# Altium PCB Button_Pad_Breakout-v05.PcbDoc
Units mil, origin at the board's own origin, x right, y up, seen from the top; angles counter-clockwise.
Board outline 3937.01 x 3937.01 mil, 2 copper layers (Top, Bottom), stack 61.811 mil thick; 30 components, 40 nets, 184 pads, 64 vias.
Unrouted connection lines stored in the file: 16.
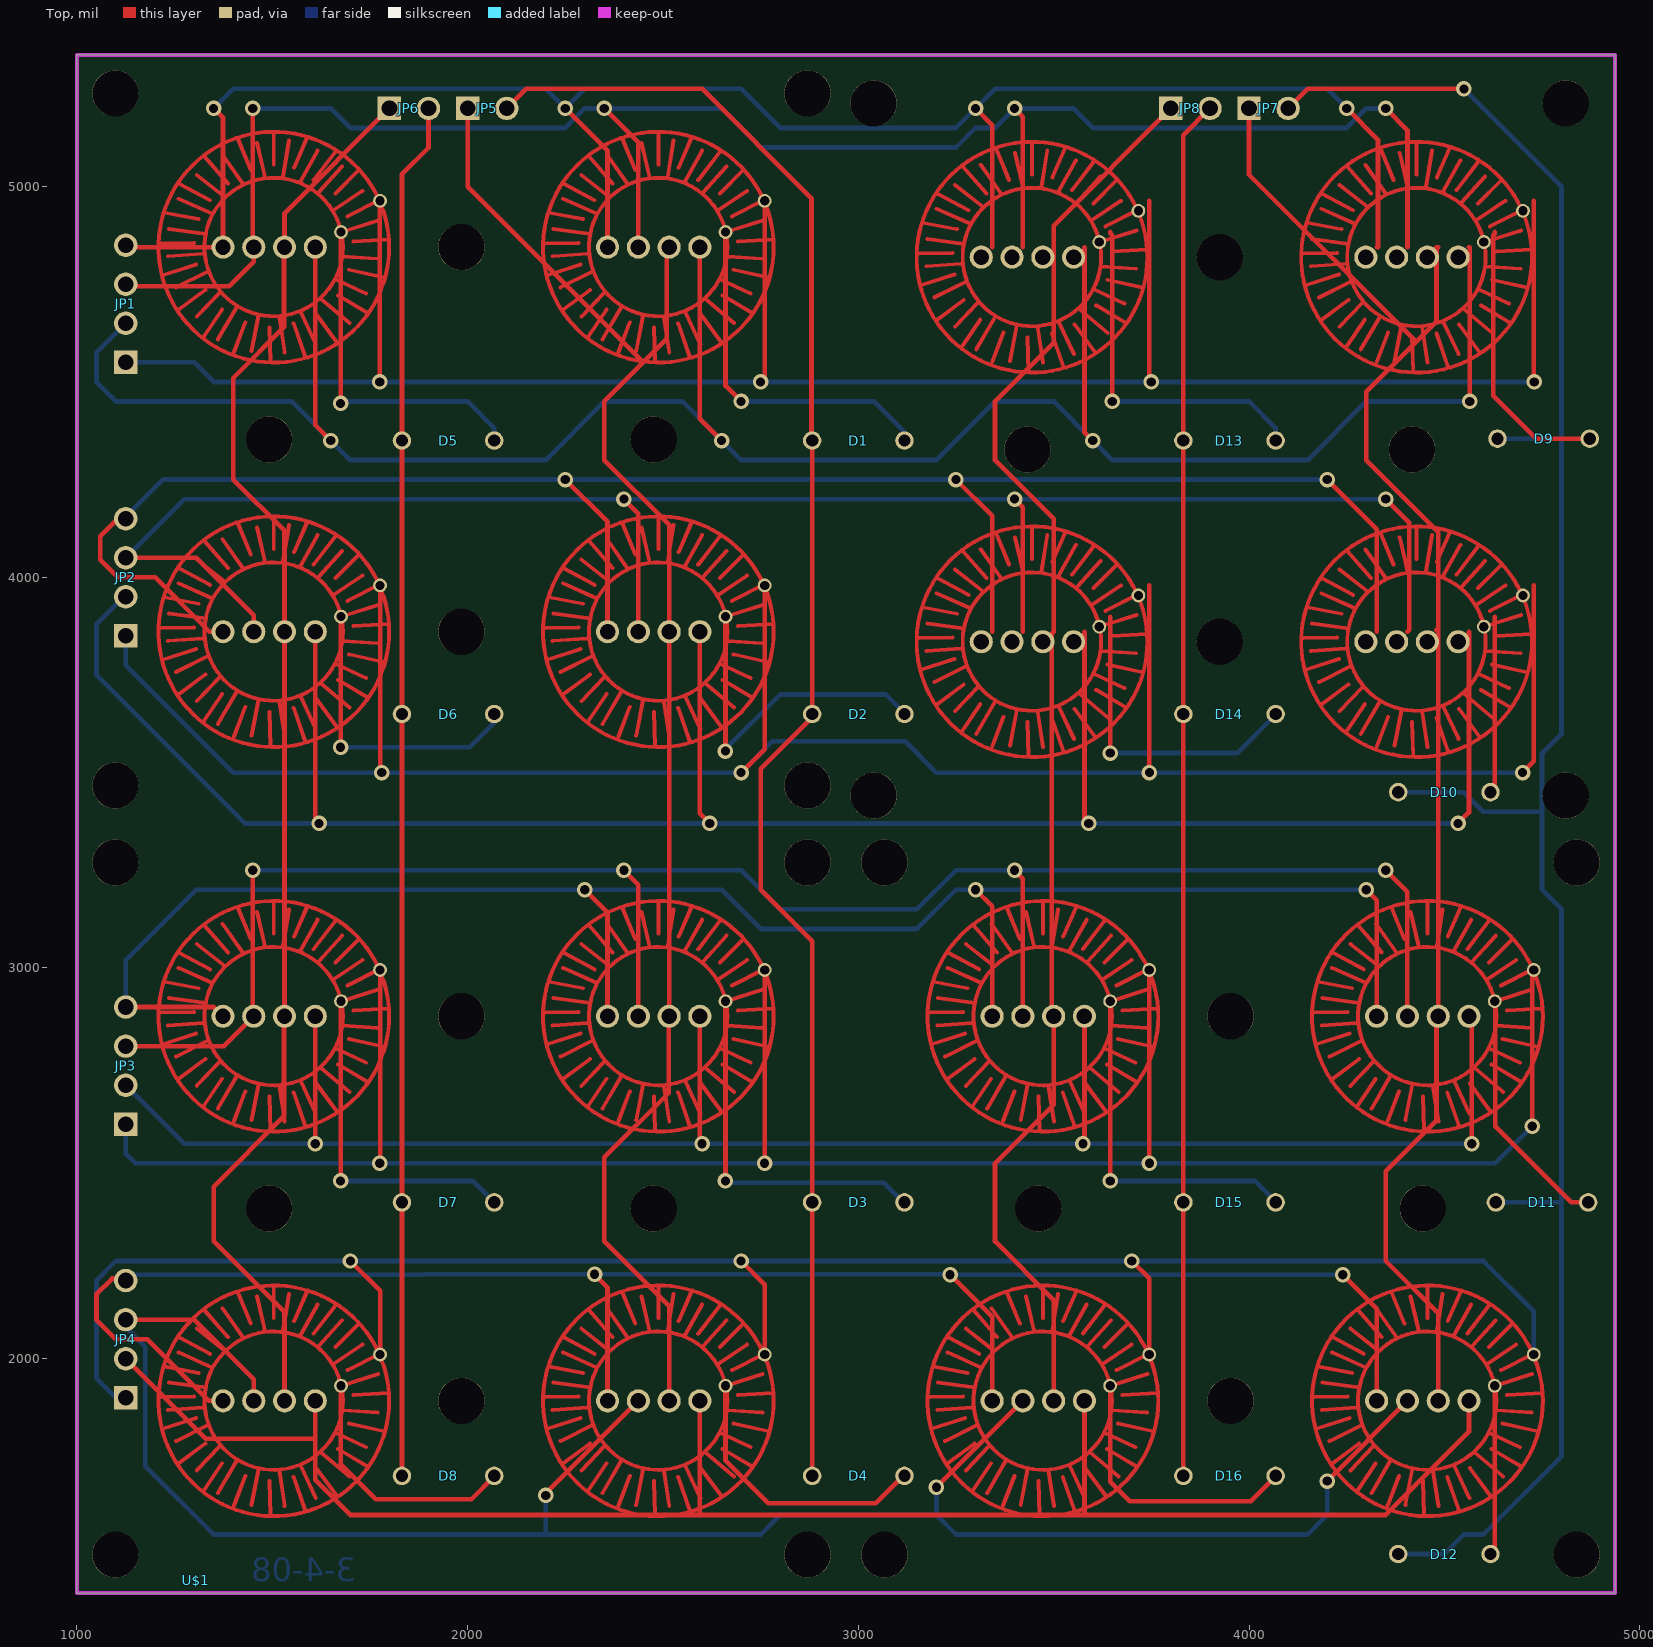
[diagram p0: Top view]
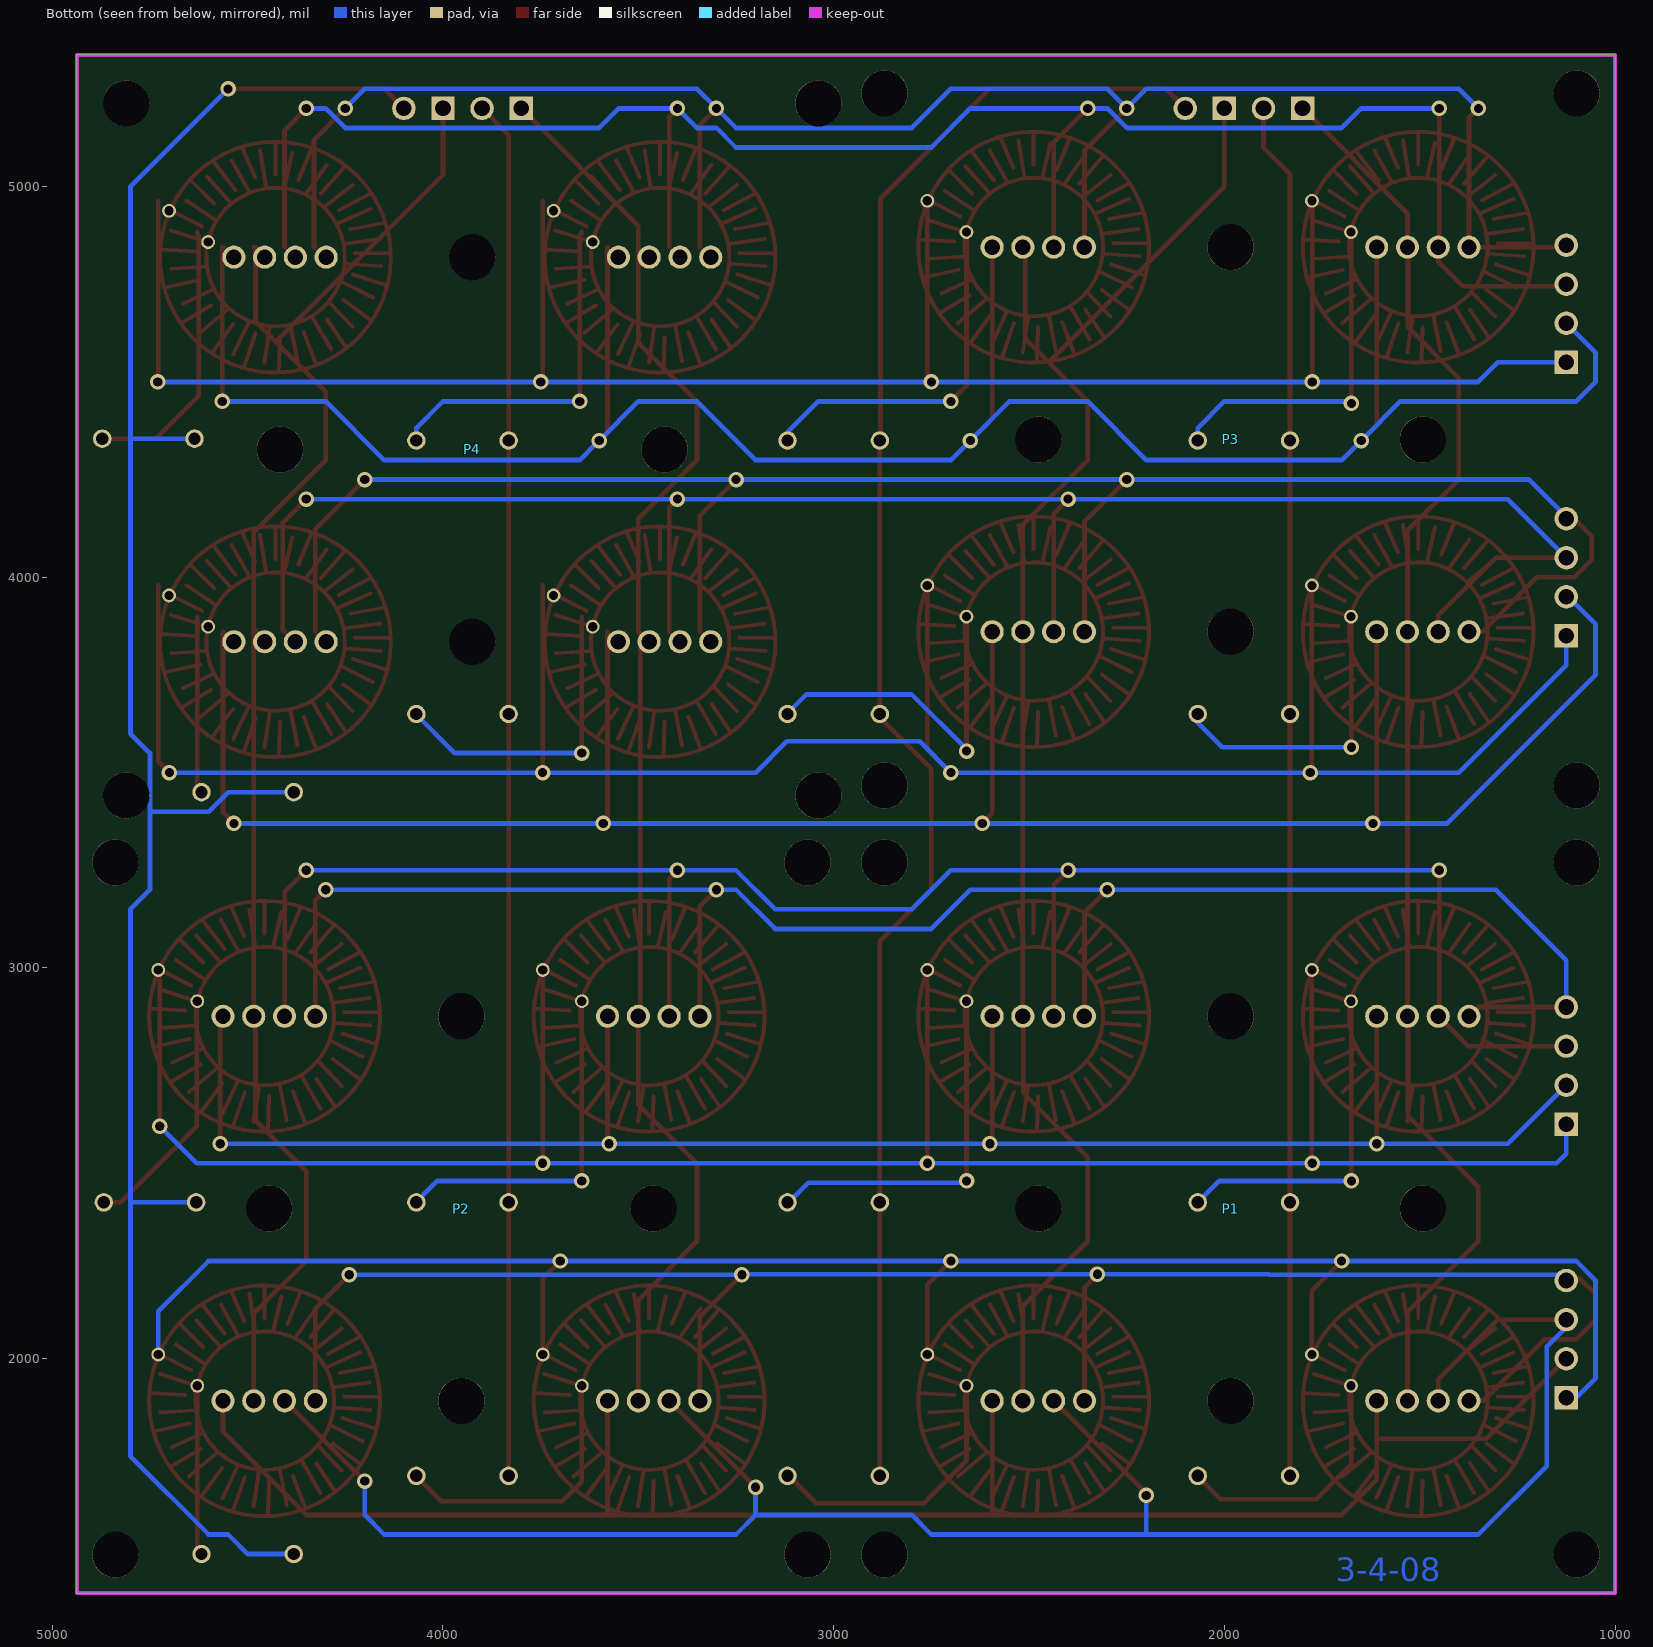
[diagram p1: Bottom view, seen from below]

## Layer stack, top to bottom
Top Solder: solder mask 0.4, Solder Resist, Dk 3.5
Top: signal copper 1.378
Dielectric 1: core 59.0551, FR-4, Dk 4.8
Bottom: signal copper 1.378
Bottom Solder: solder mask 0.4, Solder Resist, Dk 3.5

## Board outline
1000,1400 4937.01,1400 4937.01,5337.01 1000,5337.01

## Design rules (kind name [scope] priority, off if disabled: settings)
Clearance [All] p1: gap=7 ignorepadtopadclearanceinfootprint=FALSE except(0: SMDPad-SMDPad SMDPad-THPad SMDPad-Via)
Clearance "Clearance (Same Net)" [All] p2: gap=0 ignorepadtopadclearanceinfootprint=FALSE except(7: SMDPad-SMDPad SMDPad-THPad SMDPad-Via)
HoleSize HoleSize_1 [All] p1: absolutevalues=TRUE maxlimit=100000 minlimit=20 maxpercent=80.000 minpercent=20.000
HoleSize [All] p2: absolutevalues=TRUE maxlimit=100 minlimit=1 maxpercent=80.000 minpercent=20.000
HoleToHoleClearance mdViaViaSameLayer [All] p1: gap=8 allowstackedmicrovias=TRUE
HoleToHoleClearance [All] p2: gap=10 allowstackedmicrovias=TRUE
PasteMaskExpansion mlMinCreamFrame [All] p1: expansion=0
PasteMaskExpansion [All] p2: expansion=0
PolygonConnect ThermalVias [IsVia] p1: connectstyle=Direct reliefconductorwidth=10 reliefentries=4 polygonreliefangle="90 Angle" airgapwidth=10
PolygonConnect [All] p2: connectstyle=Relief reliefconductorwidth=10 reliefentries=4 polygonreliefangle="90 Angle" airgapwidth=10
RoutingVias [All] p1: holewidth=28 width=50 viastyle="Through Hole" minholewidth=28 minwidth=50 maxholewidth=28 maxwidth=50
SilkToSilkClearance [All] p1 off: silktosilkclearance=10
SilkToSolderMaskClearance [IsPad] p1 off: minsilkscreentomaskgap=10 clearancetoexposedcopper=TRUE
SolderMaskExpansion mlMinStopFrame [All] p1: expansion=4
SolderMaskExpansion [All] p2: expansion=4
Width Width_1 [All] p1: maxlimit=100000 minlimit=7 preferedwidth=10
Width [All] p2: maxlimit=10 minlimit=10 preferedwidth=10
25 further rules are at their usual default settings.

## Classes and differential pairs
component class Sheet1: P?

## Components (designator, comment, footprint, x,y, rotation, side; value= is the part's Value field where it differs from the comment)
D1 "DIODE-1N4148" DOIDE-1N4148 3000,4350 r0 top
D2 "DIODE-1N4148" DOIDE-1N4148 3000,3650 r0 top
D3 "DIODE-1N4148" DOIDE-1N4148 3000,2400 r0 top
D4 "DIODE-1N4148" DOIDE-1N4148 3000,1700 r0 top
D5 "DIODE-1N4148" DOIDE-1N4148 1950,4350 r0 top
D6 "DIODE-1N4148" DOIDE-1N4148 1950,3650 r0 top
D7 "DIODE-1N4148" DOIDE-1N4148 1950,2400 r0 top
D8 "DIODE-1N4148" DOIDE-1N4148 1950,1700 r0 top
D9 "DIODE-1N4148" DOIDE-1N4148 4753.94,4354.72 r0 top
D10 "DIODE-1N4148" DOIDE-1N4148 4500,3450 r0 top
D11 "DIODE-1N4148" DOIDE-1N4148 4750,2400 r0 top
D12 "DIODE-1N4148" DOIDE-1N4148 4500,1500 r0 top
D13 "DIODE-1N4148" DOIDE-1N4148 3950,4350 r0 top
D14 "DIODE-1N4148" DOIDE-1N4148 3950,3650 r0 top
D15 "DIODE-1N4148" DOIDE-1N4148 3950,2400 r0 top
D16 "DIODE-1N4148" DOIDE-1N4148 3950,1700 r0 top
JP1 "M04POLAR" MOLEX-1X4 1125,4550 r90 top
JP2 "M04POLAR" MOLEX-1X4 1125,3850 r90 top
JP3 "M04POLAR" MOLEX-1X4 1125,2600 r90 top
JP4 "M04POLAR" MOLEX-1X4 1125,1900 r90 top
JP5 "M02POLAR" MOLEX-1X2 2000,5200 r0 top
JP6 "M02POLAR" MOLEX-1X2 1800,5200 r0 top
JP7 "M02POLAR" MOLEX-1X2 4000,5200 r0 top
JP8 "M02POLAR" MOLEX-1X2 3800,5200 r0 top
P1 "BUTTONPAD-4x4" BUTTONPAD-2X2 2968.5,1400 r180 bottom
P2 "BUTTONPAD-4x4" BUTTONPAD-2X2 4937.01,1400 r180 bottom
P3 "BUTTONPAD-4x4" BUTTONPAD-2X2 2968.5,3368.5 r180 bottom
P4 "BUTTONPAD-4x4" BUTTONPAD-2X2 4909.25,3342.87 r180 bottom
U$1 "LOGO-SFE" SFE-NEW-WEBLOGO 1304.33,1433.07 r0 top
U$2 "CREATIVE_COMMONS" CREATIVE_COMMONS 1700,1000 r0 top

## Footprints (in the part's own frame and the unit in brackets; to place one, negate y for a bottom-side part, rotate by r counter-clockwise, add the part's x,y. Pads: shape width x height; smd on the part's side, far side on the other; paste and mask are expansions set on the pad)
BUTTONPAD-2X2 [mm] "BUTTONPAD-2X2"
  round 3 hole 3: 1(2.5,2.5) 1(2.5,47.5) 1(12.5,25) 1(25,12.5) 1(25,37.5) 1(37.5,25) 1(47.5,2.5) 1(47.5,47.5)
  round 1.5 hole 1: BLU1(13.5,12.5) BLU2(38.5,12.5) BLU3(13.5,37.5) BLU4(38.5,37.5) GND1(11.5,12.5) GND2(36.5,12.5) GND3(11.5,37.5) GND4(36.5,37.5) GRN1(15.5,12.5) GRN2(40.5,12.5) GRN3(15.5,37.5) GRN4(40.5,37.5) RED1(9.5,12.5) RED2(34.5,12.5) RED3(9.5,37.5) RED4(34.5,37.5)
  round 0.9 hole 0.6: SIG1(5.288,15.513) SIG2(7.828,13.481) SIG3(30.288,15.513) SIG4(32.828,13.481) SIG5(5.288,40.513) SIG6(7.828,38.481) SIG7(30.288,40.513) SIG8(32.828,38.481)
  Bottom circle w0.254: c12.2,37.5 r7.5
  Bottom circle w0.254: c12.21,37.51 r4.5
  Bottom circle w0.254: c37.2,37.5 r7.5
  Bottom circle w0.254: c37.21,37.51 r4.5
  Bottom circle w0.254: c12.2,12.5 r7.5
  Bottom circle w0.254: c12.21,12.51 r4.5
  Bottom circle w0.254: c37.2,12.5 r7.5
  Bottom circle w0.254: c37.21,12.51 r4.5
  Bottom lines w0.254: 44.58,12.74 42.38,12.77 ; 44.58,37.74 42.38,37.77 ; 44.42,10.68 42.25,11.38 ; 44.42,35.68 42.25,36.38 ; 44.31,14.74 42.09,14.32 ; 44.31,39.74 42.09,39.32 ; 44.07,11.91 41.8,12.07 ; 44.07,36.91 41.8,37.07 ; 44.01,13.68 41.61,13.36 ; 44.01,38.68 41.61,38.36 ; 43.56,9.88 41.5,10.9 ; 43.56,34.88 41.5,35.9 ; 43.4,15.65 41.18,14.66 ; 43.4,40.65 41.18,39.66 ; 43.37,8.44 41.64,9.72 ; 43.37,33.44 41.64,34.72 ; 43.35,16.62 41.34,15.55 ; 43.35,41.62 41.34,40.55 ; 42.21,7.98 40.7,9.56 ; 42.21,17.2 40.38,15.76 ; 42.21,32.98 40.7,34.56 ; 42.21,42.2 40.38,40.76 ; 41.74,6.7 40.57,8.44 ; 41.74,31.7 40.57,33.44 ; 41.72,18.41 40.17,16.64 ; 41.72,43.41 40.17,41.64 ; 40.83,6.51 39.61,8.6 ; 40.83,31.51 39.61,33.6 ; 40.54,18.51 39.18,16.59 ; 40.54,43.51 39.18,41.59 ; 39.79,5.69 39.05,7.62 ; 39.79,30.69 39.05,32.62 ; 39.53,19.53 38.7,17.52 ; 39.53,44.53 38.7,42.52 ; 38.64,5.74 38.19,8.04 ; 38.64,30.74 38.19,33.04 ; 38.3,19.29 37.79,17.12 ; 38.3,44.29 37.79,42.12 ; 37.49,7.29 37.42,5.06 ; 37.49,32.29 37.42,30.06 ; 37.2,17.87 37.2,19.96 ; 37.2,42.87 37.2,44.96 ; 36.83,7.93 36.49,5.66 ; 36.83,32.93 36.49,30.66 ; 36.59,17.07 36.21,19.45 ; 36.59,42.07 36.21,44.45 ; 35.91,7.55 35.17,5.42 ; 35.91,32.55 35.17,30.42 ; 35.88,17.68 35.04,19.61 ; 35.88,42.68 35.04,44.61 ; 35.46,8.28 34.47,6.19 ; 35.46,16.8 34.35,18.78 ; 35.46,33.28 34.47,31.19 ; 35.46,41.8 34.35,43.78 ; 34.61,16.86 33.19,18.7 ; 34.61,41.86 33.19,43.7 ; 34.44,8.13 33.11,6.33 ; 34.44,33.13 33.11,31.33 ; 34.29,16.05 32.76,17.74 ; 34.29,41.05 32.76,42.74 ; 34.13,9.13 32.28,7.58 ; 34.13,34.13 32.28,32.58 ; 33.35,14.88 31.43,16.16 ; 33.35,39.88 31.43,41.16 ; 33.2,16 31.7,17.5 ; 33.2,41 31.7,42.5 ; 33.19,10.42 31.19,9.48 ; 33.19,35.42 31.19,34.48 ; 33.03,9.37 31.13,8.25 ; 33.03,34.37 31.13,33.25 ; 32.74,11.89 30.44,11.75 ; 32.74,13.5 30.41,14.24 ; 32.74,36.89 30.44,36.75 ; 32.74,38.5 30.41,39.24 ; 32.42,14.5 30.36,15.54 ; 32.42,39.5 30.36,40.54 ; 32.31,11.03 30.04,10.52 ; 32.31,36.03 30.04,35.52 ; 32.02,12.87 29.72,13.01 ; 32.02,37.87 29.72,38.01 ; 19.58,12.74 17.38,12.77 ; 19.58,37.74 17.38,37.77 ; 19.42,10.68 17.25,11.38 ; 19.42,35.68 17.25,36.38 ; 19.31,14.74 17.09,14.32 ; 19.31,39.74 17.09,39.32 ; 19.07,11.91 16.8,12.07 ; 19.07,36.91 16.8,37.07 ; 19.01,13.68 16.61,13.36 ; 19.01,38.68 16.61,38.36 ; 18.56,9.88 16.5,10.9 ; 18.56,34.88 16.5,35.9 ; 18.4,15.65 16.18,14.66 ; 18.4,40.65 16.18,39.66 ; 18.37,8.44 16.64,9.72 ; 18.37,33.44 16.64,34.72 ; 18.35,16.62 16.34,15.55 ; 18.35,41.62 16.34,40.55 ; 17.21,7.98 15.7,9.56 ; 17.21,17.2 15.38,15.76 ; 17.21,32.98 15.7,34.56 ; 17.21,42.2 15.38,40.76 ; 16.74,6.7 15.57,8.44 ; 16.74,31.7 15.57,33.44 ; 16.72,18.41 15.17,16.64 ; 16.72,43.41 15.17,41.64 ; 15.83,6.51 14.61,8.6 ; 15.83,31.51 14.61,33.6 ; 15.54,18.51 14.18,16.59 ; 15.54,43.51 14.18,41.59 ; 14.79,5.69 14.05,7.62 ; 14.79,30.69 14.05,32.62 ; 14.53,19.53 13.7,17.52 ; 14.53,44.53 13.7,42.52 ; 13.64,5.74 13.19,8.04 ; 13.64,30.74 13.19,33.04 ; 13.3,19.29 12.79,17.12 ; 13.3,44.29 12.79,42.12 ; 12.49,7.29 12.42,5.06 ; 12.49,32.29 12.42,30.06 ; 12.2,17.87 12.2,19.96 ; 12.2,42.87 12.2,44.96 ; 11.83,7.93 11.49,5.66 ; 11.83,32.93 11.49,30.66 ; 11.59,17.07 11.21,19.45 ; 11.59,42.07 11.21,44.45 ; 10.91,7.55 10.17,5.42 ; 10.91,32.55 10.17,30.42 ; 10.88,17.68 10.04,19.61 ; 10.88,42.68 10.04,44.61 ; 10.46,8.28 9.47,6.19 ; 10.46,16.8 9.35,18.78 ; 10.46,33.28 9.47,31.19 ; 10.46,41.8 9.35,43.78 ; 9.61,16.86 8.19,18.7 ; 9.61,41.86 8.19,43.7 ; 9.44,8.13 8.11,6.33 ; 9.44,33.13 8.11,31.33 ; 9.29,16.05 7.76,17.74 ; 9.29,41.05 7.76,42.74 ; 9.13,9.13 7.28,7.58 ; 9.13,34.13 7.28,32.58 ; 8.35,14.88 6.43,16.16 ; 8.35,39.88 6.43,41.16 ; 8.2,16 6.7,17.5 ; 8.2,41 6.7,42.5 ; 8.19,10.42 6.19,9.48 ; 8.19,35.42 6.19,34.48 ; 8.03,9.37 6.13,8.25 ; 8.03,34.37 6.13,33.25 ; 7.74,11.89 5.44,11.75 ; 7.74,13.5 5.41,14.24 ; 7.74,36.89 5.44,36.75 ; 7.74,38.5 5.41,39.24 ; 7.42,14.5 5.36,15.54 ; 7.42,39.5 5.36,40.54 ; 7.31,11.03 5.04,10.52 ; 7.31,36.03 5.04,35.52 ; 7.02,12.87 4.72,13.01 ; 7.02,37.87 4.72,38.01
CREATIVE_COMMONS [mil] "CREATIVE_COMMONS"
DOIDE-1N4148 [mil] "DOIDE-1N4148"
  round 47.25 hole 31.5: P$1(118.11,0) P$2(-118.11,0)
MOLEX-1X2 [mil] "MOLEX-1X2"
  rect 60x60 hole 40: 1(0,0)
  round 60 hole 40: 2(100,0)
MOLEX-1X4 [mil] "MOLEX-1X4"
  rect 60x60 hole 40: 1(0,0)
  round 60 hole 40: 2(100,0) 3(200,0) 4(300,0)
SFE-NEW-WEBLOGO [mil] "SFE-NEW-WEBLOGO"

## Part data
JP1 JP2 JP3 JP4: "Header 4Standard 4-pin 0.1\" header. Use with straight break away headers (SKU : PRT-00116), right angle break away headers (PRT-00553), swiss pins (PRT-00743), machine pins (PRT-00117), and female headers (PRT-00115). Molex polarized connector foot print use with SKU : PRT-08231 with associated crimp pins and housings."
JP5 JP6 JP7 JP8: "Header 2Standard 2-pin 0.1\" header. Use with straight break away headers (SKU : PRT-00116), right angle break away headers (PRT-00553), swiss pins (PRT-00743), machine pins (PRT-00117), and female headers (PRT-00115). Molex polarized connector foot print use with SKU : PRT-08233 with associated crimp pins and housings."
P1 P2 P3 P4: library part BUTTONPAD-2X2, "5mm Button PadProven layout and schematic for 2x2 button pad. Panelize this device/fp to a 4x4 pad if needed. Spark Fun Electronics SKU : COM-07835. Compatible common cathode tri-color LED SKU : COM-00105"
U$1: "Spark Fun Electronics PCB LogoThis is the standard Spark Fun Electronics PCB logo.", SFE=SFE
U$2: Designby="Design by:", http://creativecommons.org/licenses/by-sa/3.0=http://creativecommons.org/licenses/by-sa/3.0, ReleasedundertheCreativeCommonsAttributionShare-Alike3.0License="Released under the Creative Commons Attribution Share-Alike 3.0 License"

## Via types
v1: diameter 39.62/39.62 (per signal layer), hole 23.62, Top to Bottom, 64 vias

## Nets (pads, with @x,y where several pads share a name; then routed paths per layer and width w, separated by ;. In a path a pad name is that pad's centre, name@x,y a point inside that pad or via, vN(x,y) a via of type N, cw(c..) or ccw(c..) an arc to the next point about the centre after c; other vN are vias at no path point)
BLUE1: JP1.3 P3.BLU3 P3.BLU4 P4.BLU3 P4.BLU4 | length 4948.1
  Top w12: JP1.3 1130,4745 1390,4745 1452.76,4807.76 1452.76,4847.24 1450,4850 v1(1450,5200) ; v1(2350,5200) 2437.01,5112.99 P3.BLU3 ; v1(3400,5200) 3421.26,5178.74 3421.26,4844.88 ; v1(4350,5200) 4405.51,5144.49 4405.51,4844.88
  Bottom w12: v1(1450,5200) 1650,5200 1700,5150 2250,5150 2300,5200 v1(2350,5200) 2650,5200 2750,5100 3250,5100 3300,5150 3350,5150 v1(3400,5200) 3550,5200 3600,5150 4250,5150 4300,5200 v1(4350,5200)
BLUE2: JP2.3 P3.BLU1 P3.BLU2 P4.BLU1 P4.BLU2 | length 4786.7
  Top w12: JP2.3 1305,4050 1452.76,3902.24 P3.BLU2 ; v1(2400,4200) 2437.01,4162.99 P3.BLU1 ; v1(3400,4200) 3421.26,4178.74 3421.26,3860.63 ; v1(4350,4200) 4410,4140 4410,3865 4409.88,3865 4405.51,3860.63
  Bottom w12: JP2.3 1275,4200 v1(2400,4200) v1(3400,4200) v1(4350,4200)
BLUE3: JP3.3 P1.BLU3 P1.BLU4 P2.BLU3 P2.BLU4 | length 4886.9
  Top w12: JP3.3 1376.38,2800 P1.BLU4 1450,2879.13 v1(1450,3250) ; v1(2400,3250) 2437.01,3212.99 P1.BLU3 ; v1(3400,3250) 3421.26,3228.74 P2.BLU4 ; v1(4350,3250) 4405,3195 P2.BLU3@4405,2875.87 ; P2.BLU3@4405,2875 P2.BLU3@4405,2875.87 ; P2.BLU3 P2.BLU3@4405,2875.87
  Bottom w12: v1(1450,3250) v1(2400,3250) 2700,3250 2800,3150 3150,3150 3250,3250 v1(3400,3250) v1(4350,3250)
BLUE4: JP4.3 P1.BLU1 P1.BLU2 P2.BLU1 P2.BLU2 | length 5202.8
  Top w12: JP4.3 1300,2100 1452.76,1947.24 P1.BLU2 ; v1(2200,1650) 2200,1655.12 P1.BLU1 ; v1(3200,1670.87) P2.BLU2 ; v1(4200,1686.61) P2.BLU1
  Bottom w12: JP4.3 1125,2080 1175,2030 1175,1725 1350,1550 2200,1550 ; v1(2200,1650) 2200,1550 ; v1(3200,1670.87) 3200,1600 ; v1(4200,1686.61) 4200,1600 4150,1550 3250,1550 3200,1600 ; 2200,1550 2750,1550 2800,1600 3200,1600
GREEN1: JP1.4 P3.GRN3 P3.GRN4 P4.GRN3 P4.GRN4 | length 4846
  Top w12: JP1.4 1130.12,4844.88 P3.GRN4 1374.02,5175.98 v1(1350,5200) ; v1(2250,5200) 2358.27,5091.73 P3.GRN3 ; v1(3300,5200) 3342.52,5157.48 3342.52,4844.88 ; v1(4250,5200) 4330,5120 4330,4845 4326.89,4845 4326.77,4844.88
  Bottom w12: v1(1350,5200) 1400,5250 2200,5250 v1(2250,5200) 2300,5250 2700,5250 2800,5150 3250,5150 v1(3300,5200) 3350,5250 4200,5250 v1(4250,5200)
GREEN2: JP2.4 P3.GRN1 P3.GRN2 P4.GRN1 P4.GRN2 | length 4961.3
  Top w12: JP2.4 1115,4150 1110,4155 1060,4105 1060,4045 1105,4000 1200,4000 1339.37,3860.63 P3.GRN2 ; v1(2250,4250) 2358.27,4141.73 P3.GRN1 ; v1(3250,4250) 3342.52,4157.48 3342.52,3860.63 ; v1(4200,4250) 4326.77,4123.23 4326.77,3860.63
  Bottom w12: JP2.4 1125,4155 1220,4250 v1(2250,4250) v1(3250,4250) v1(4200,4250)
GREEN3: JP3.4 P1.GRN3 P1.GRN4 P2.GRN3 P2.GRN4 | length 4739.9
  Top w12: JP3.4 1350.39,2900 P1.GRN4 ; v1(2300,3200) 2358.27,3141.73 P1.GRN3 ; v1(3300,3200) 3342.52,3157.48 P2.GRN4 ; v1(4300,3200) 4326.77,3173.23 P2.GRN3
  Bottom w12: JP3.4@1130,2900 JP3.4 1125,3020 1305,3200 v1(2300,3200) 2650,3200 2750,3100 3150,3100 3250,3200 v1(3300,3200) v1(4300,3200)
GREEN4: JP4.4 P1.GRN1 P1.GRN2 P2.GRN1 P2.GRN2 | length 4760.9
  Top w12: JP4.4 1120,2205 1090,2205 1050,2165 1050,2100 1100,2050 1180,2050 1337.87,1892.13 P1.GRN2 ; v1(2325,2216) 2325,2215 2358.27,2181.73 P1.GRN1 ; v1(3235,2215) 3342.52,2107.48 P2.GRN2 ; v1(4240,2215) 4326.77,2128.23 P2.GRN1
  Bottom w12: JP4.4 1140,2215 1885,2215 1886,2216 v1(2325,2216) 3231,2216 3235,2220 v1(3235,2215) v1(4240,2215)
LED-GND1: JP5.1 P1.GND1 P1.GND3 P3.GND1 P3.GND3 | length 4064.8
  Top w12: JP5.1 2000,5000 2450,4550 ; P3.GND1@2515,3865 P3.GND1@2515.75,3864.25 ; P1.GND1@2515.75,1892.13 2515.75,2134.25 2350,2300 2350,2515 2515,2680 2515,2875 2515.75,2875.75 2515.75,3860.63 P3.GND1@2515.75,3864.25 ; P3.GND3@2515.75,4844.88 2515.75,4840.75 2510,4835 2510,4610 2450,4550 ; 2450,4550 2350,4450 2350,4300 2515.75,4134.25 P3.GND1@2515.75,3864.25
LED-GND2: JP6.1 P1.GND2 P1.GND4 P3.GND2 P3.GND4 | length 3689.4
  Top w12: P1.GND2 1531.5,2118.5 1350,2300 1350,2440 1530,2620 1530,2875 1531.38,2876.38 P1.GND4 1531.5,3858.5 1530,3860 1530.63,3860.63 P3.GND2 1531.5,4118.5 1400,4250 1400,4510 1530,4640 1530,4830 1540,4840 1535.12,4844.88 P3.GND4 1531.5,4931.5 JP6.1
LED-GND3: JP7.1 P2.GND1 P2.GND3 P4.GND1 P4.GND3 | length 4001.5
  Top w12: JP7.1 4000,5030 4427.5,4602.5 ; 4480,3865 4484.25,3860.75 ; P2.GND1 4484.25,2115.75 4350,2250 4350,2480 4480,2610 4480,2875 4481.38,2876.38 P2.GND3 4484.25,3860.63 4484.25,3860.75 ; 4484.25,4844.88 4480.12,4844.88 4480,4845 4480,4655 4427.5,4602.5 ; 4427.5,4602.5 4300,4475 4300,4300 4484.25,4115.75 4484.25,3860.75
LED-GND4: JP8.1 P2.GND2 P2.GND4 P4.GND2 P4.GND4 | length 3686.2
  Top w12: P2.GND2 3500,2150 3350,2300 3350,2500 3500,2650 3500,2875 P2.GND4@3498.62,2876.38 ; P2.GND4 P2.GND4@3498.62,2876.38 ; JP8.1 3500,4900 3500,4600 3350,4450 3350,4300 3500,4150 3500,3860 3495,3855 3495,2880 P2.GND4@3498.62,2876.38
NetD1_P$1: D1.P$1 P3.SIG6 | length 921.6
  Top w12: P3.SIG6 2660.31,4489.69 v1(2700,4450)
  Bottom w12: v1(2700,4450) 3040,4450 3116.14,4373.86 D1.P$1
NetD2_P$1: D2.P$1 P3.SIG2 | length 891.5
  Top w12: v1(2660,3555) 2660,3900 2660.31,3899.69 P3.SIG2
  Bottom w12: v1(2660,3555) 2660,3560 2800,3700 3070,3700 3120,3650 D2.P$1
NetD3_P$1: D3.P$1 P1.SIG6 | length 941
  Top w12: v1(2660,2455) 2660,2910 2660.31,2910.31 P1.SIG6
  Bottom w12: v1(2660,2455) 2665,2450 3065,2450 3115,2400 D3.P$1
NetD4_P$1: D4.P$1 P1.SIG2 | length 723.5
  Top w12: P1.SIG2 2660,1930.43 2660,1740 2770,1630 3045,1630 3115,1700 D4.P$1
NetD5_P$1: D5.P$1 P3.SIG8 | length 898.4
  Top w12: v1(1675,4445) 1675,4880 1676.06,4881.06 P3.SIG8
  Bottom w12: v1(1675,4445) 1680,4440 1690,4450 2000,4450 2068.11,4381.89 D5.P$1
NetD6_P$1: D6.P$1 P3.SIG4 | length 777.5
  Top w12: v1(1675,3565) 1675,3900 1675.75,3899.25 P3.SIG4
  Bottom w12: v1(1675,3565) 2005,3565 2068.11,3628.11 D6.P$1
NetD7_P$1: D7.P$1 P1.SIG8 | length 877
  Top w12: v1(1675,2455) 1675,2915 P1.SIG8
  Bottom w12: v1(1675,2455) 2013.11,2455 D7.P$1
NetD8_P$1: D8.P$1 P1.SIG4 | length 660.2
  Top w12: P1.SIG4 1675,1929.69 1675,1730 1765,1640 2010,1640 2070,1700 D8.P$1
NetD9_P$1: D9.P$1 P4.SIG6 | length 712.8
  Top w12: 4628.82,4883.5 4628.82,4878.82 4625,4875 4625,4465 4735.28,4354.72 D9.P$1
NetD10_P$1: D10.P$1 P4.SIG2 | length 458.1
  Top w12: D10.P$1 4615,3450 4628.82,3463.82 4628.82,3899.25
NetD11_P$1: D11.P$1 P2.SIG6 | length 639.4
  Top w12: P2.SIG6 4628.82,2911.18 4630,2910 4630,2595 4825,2400 D11.P$1
NetD12_P$1: D12.P$1 P2.SIG2 | length 445.2
  Top w12: D12.P$1 4618.11,1496.89 4620,1495 4628.82,1503.82 P2.SIG2
NetD13_P$1: D13.P$1 P4.SIG8 | length 918.1
  Top w12: 3644.57,4883.5 3644.57,4880.43 3650,4875 v1(3650,4450)
  Bottom w12: v1(3650,4450) 3655,4455 3660,4450 4000,4450 4068.11,4381.89 D13.P$1
NetD14_P$1: D14.P$1 P4.SIG4 | length 817.7
  Top w12: 3644.57,3899.25 3644.57,3550.43 v1(3645,3550)
  Bottom w12: v1(3645,3550) 3970,3550 4070,3650 D14.P$1
NetD15_P$1: D15.P$1 P2.SIG8 | length 916.3
  Top w12: P2.SIG8 3640,2915 3645,2910 v1(3645,2455)
  Bottom w12: v1(3645,2455) 4015,2455 4070,2400 D15.P$1
NetD16_P$1: D16.P$1 P2.SIG4 | length 720.5
  Top w12: P2.SIG4 3644.57,1930.43 3645,1930 3645,1685 3695,1635 4005,1635 4070,1700 D16.P$1
RED1: JP1.2 P3.RED3 P3.RED4 P4.RED3 P4.RED4 | length 6029.5
  Top w12: P3.RED4 1610.24,4389.76 v1(1650,4350) ; P3.RED3 2594.49,4405.51 v1(2650,4350) ; 3578.74,4844.88 3578.74,4371.26 v1(3600,4350) ; 4562.99,4844.88 4563.11,4845 4565,4845 v1(4565,4450)
  Bottom w12: JP1.2 1050,4575 1050,4500 1100,4450 1550,4450 v1(1650,4350) 1700,4300 2200,4300 2350,4450 2550,4450 v1(2650,4350) 2700,4300 3200,4300 3350,4450 3500,4450 v1(3600,4350) ; v1(4565,4450) 4300,4450 4150,4300 3650,4300 v1@3605,4345 ; v1(3600,4350) v1@3605,4345 ; v1(3600,4350) 3600,4345 v1@3605,4345
RED2: JP2.2 P3.RED1 P3.RED2 P4.RED1 P4.RED2 | length 5869.8
  Top w12: P3.RED2 1610.24,3384.76 1620,3375 v1(1620,3370) ; P3.RED1 2594.49,3395.51 v1(2620,3370) ; 3578.74,3860.63 3578.74,3381.26 v1(3590,3370) ; v1(4535,3370) 4562.99,3397.99 4562.99,3860.63
  Bottom w12: JP2.2 1120,3950 1050,3880 1050,3750 1430,3370 v1(1620,3370) v1(2620,3370) v1(3590,3370) v1(4535,3370)
RED3: JP3.2 P1.RED3 P1.RED4 P2.RED3 P2.RED4 | length 4819.9
  Top w12: v1(1610,2550) 1610.24,2550.24 P1.RED4 ; P1.RED3 2594.49,2560.51 2600,2555 v1(2600,2550) ; v1(3575,2550) 3575,2555 3578.74,2558.74 P2.RED4 ; P2.RED3 4563.62,2876.38 4570,2870 v1(4570,2550)
  Bottom w12: JP3.2 1275,2550 v1(1610,2550) v1(2600,2550) v1(3575,2550) v1(4570,2550)
RED4: JP4.2 P1.RED1 P1.RED2 P2.RED1 P2.RED2 | length 4514.8
  Top w12: JP4.2 1330,1795 1610.24,1795 ; P1.RED2 1610.24,1795 ; P1.RED1 2594.49,1605.51 2595,1605 2595,1600 ; P2.RED2 3578.74,1606.26 3580,1605 3580,1600 ; P2.RED1 4562.99,1812.99 4350,1600 3580,1600 ; 1610.24,1795 1610.24,1689.76 1700,1600 2595,1600 ; 2595,1600 3580,1600
SWITCH1: JP1.1 P3.SIG5 P3.SIG7 P4.SIG5 P4.SIG7 | length 5487.2
  Top w12: v1(1775,4500) 1775,4960 1776.06,4961.06 P3.SIG7 ; v1(2750,4500) 2760.32,4510.32 P3.SIG5 ; 3744.57,4963.5 3744.57,4505.43 v1(3750,4500) ; 4728.82,4963.5 4728.82,4501.18 v1(4730,4500)
  Bottom w12: JP1.1 1300,4550 1350,4500 v1(1775,4500) v1(2750,4500) v1(3750,4500) v1(4730,4500)
SWITCH2: JP2.1 P3.SIG1 P3.SIG3 P4.SIG1 P4.SIG3 | length 5784.4
  Top w12: P3.SIG3 1776.06,3523.94 v1(1780,3500) ; v1(2700,3500) 2760.32,3560.32 P3.SIG1 ; 3744.57,3979.25 3744.57,3555.43 v1(3745,3500) ; v1(4700,3500) 4728.82,3528.82 4728.82,3979.25
  Bottom w12: JP2.1 1125,3775 1400,3500 v1(1780,3500) v1(2700,3500) 2780,3580 3120,3580 3200,3500 v1(3745,3500) v1(4700,3500)
SWITCH3: JP3.1 P1.SIG5 P1.SIG7 P2.SIG5 P2.SIG7 | length 5612
  Top w12: v1(1775,2500) 1776.06,2501.06 P1.SIG7 ; v1(2760,2500) 2760.32,2500.31 P1.SIG5 ; P2.SIG7 3744.57,2505.43 3745,2505 v1(3745,2500) ; v1(4725,2595) 4725,2990 4728.82,2993.82 P2.SIG5
  Bottom w12: JP3.1 1125,2525 1150,2500 v1(1775,2500) v1(2760,2500) v1(3745,2500) 4630,2500 v1(4725,2595)
SWITCH4: JP4.1 P1.SIG1 P1.SIG3 P2.SIG1 P2.SIG3 | length 5001.7
  Top w12: v1(1700,2250) 1776.06,2173.94 P1.SIG3 ; v1(2700,2250) 2760.32,2189.69 P1.SIG1 ; v1(3700,2250) 3744.57,2205.43 P2.SIG3
  Bottom w12: JP4.1 1100,1900 1050,1950 1050,2200 1100,2250 v1(1700,2250) v1(2700,2250) v1(3700,2250) 4600,2250 4728.82,2121.18 P2.SIG1
SWT-GND1: D1.P$2 D2.P$2 D3.P$2 D4.P$2 JP5.2 | length 4301.3
  Top w12: JP5.2 2150,5250 2600,5250 2880,4970 D1.P$2@2880,4350 ; D4.P$2 2881.89,2398.11 2880,2400 D3.P$2 2881.89,3068.11 2750,3200 2750,3510 2881.89,3641.89 D2.P$2 2881.89,4348.11 D1.P$2@2880,4350 ; D1.P$2 D1.P$2@2880,4350
SWT-GND2: D5.P$2 D6.P$2 D7.P$2 D8.P$2 JP6.2 | length 3534.3
  Top w12: D8.P$2 1831.89,2398.11 1830,2400 D7.P$2 1831.89,3648.11 D6.P$2@1830,3650 ; D6.P$2 D6.P$2@1830,3650 ; JP6.2 1900,5100 1831.89,5031.89 D5.P$2 1831.89,3651.89 D6.P$2@1830,3650
SWT-GND3: D9.P$2 D10.P$2 D11.P$2 D12.P$2 JP7.2 | length 5358.6
  Top w12: JP7.2 4150,5250 v1(4550,5250)
  Bottom w12: D12.P$2 4500,1500 4550,1550 4600,1550 4800,1750 4800,2400 ; D10.P$2 4550,3450 4600,3400 4750,3400 ; v1(4550,5250) 4800,5000 4800,4355 ; D11.P$2 4800,2400 ; D9.P$2 4799.72,4354.72 4800,4355 ; 4750,3400 4750,3200 4800,3150 4800,2400 ; 4750,3400 4750,3550 4800,3600 4800,4355
SWT-GND4: D13.P$2 D14.P$2 D15.P$2 D16.P$2 JP8.2 | length 3536.2
  Top w12: D15.P$2@3830,2395 D15.P$2@3831.89,2396.89 ; D16.P$2 3830,1700 3831.89,1701.89 D15.P$2@3831.89,2396.89 ; JP8.2 3831.89,5131.89 D13.P$2 3831.89,3651.89 3830,3650 D14.P$2 D15.P$2 D15.P$2@3831.89,2396.89
pads on no net: P1.1 P2.1 P3.1 P4.1

## Keep-outs
Keep-Out Layer:
  the board outline again, w10

## Other copper
Bottom:
  text "3-4-08" at 1715,1430 h59.5

## Silkscreen, mask and mechanical layers (free items; w line width, h text height)
Dimension:
  the board outline again, w10
Top Assembly:
  text "GREEN4" at 1250,4910 h86.8
  text "BLUE4" at 1250,4720 h86.8
  text "RED4" at 1250,4620 h86.8
  text "LED-GND4" at 1800,4585 h108.5 r90
  text "SWT-GND4" at 1905,4585 h108.5 r90
  text "LED-GND3" at 2135,4585 h108.5 r90
  text "SWT-GND3" at 2230,4585 h108.5 r90
  text "LED-GND2" at 3775,4585 h108.5 r90
  text "SWT-GND2" at 3875,4585 h108.5 r90
  text "LED-GND1" at 4115,4585 h108.5 r90
  text "SWT-GND1" at 4215,4585 h108.5 r90
  text "SWITCH4" at 1250,4520 h86.8
  text "GREEN3" at 1250,4120 h86.8
  text "BLUE3" at 1250,4025 h86.8
  text "RED3" at 1250,3925 h86.8
  text "SWITCH3" at 1250,3755 h86.8
  text "GREEN2" at 1250,2940 h86.8
  text "BLUE2" at 1250,2775 h86.8
  text "RED2" at 1250,2670 h86.8
  text "SWITCH2" at 1245,2570 h86.8
  text "GREEN1" at 1250,2175 h86.8
  text "Button Pad Breakout" at 2388.68,2087.2 h108.5
  text "BLUE1" at 1250,2070 h86.8
  text "www.sparkfun.com" at 2485.57,1986.97 h108.5
  text "RED1" at 1250,1970 h86.8
  text "SWITCH1" at 1250,1790 h86.8
  text "N. Seidle" at 3000,1000 h108.5

## Text inside footprints (layer, text, board x,y; h text height)
P1: Top Assembly "C3" at 2505.9,2955.12 h62; Top Assembly "C4" at 1521.65,2955.12 h62; Top Assembly "C1" at 2505.9,1970.87 h62; Top Assembly "C2" at 1521.65,1961.02 h62
P2: Top Assembly "C3" at 4474.41,2955.12 h62; Top Assembly "C4" at 3490.16,2955.12 h62; Top Assembly "C1" at 4474.41,1970.87 h62; Top Assembly "C2" at 3490.16,1961.02 h62
P3: Top Assembly "C3" at 2505.9,4923.62 h62; Top Assembly "C4" at 1521.65,4923.62 h62; Top Assembly "C1" at 2505.9,3939.37 h62; Top Assembly "C2" at 1521.65,3929.52 h62
P4: Top Assembly "C3" at 4446.65,4897.99 h62; Top Assembly "C4" at 3462.4,4897.99 h62; Top Assembly "C1" at 4446.65,3913.74 h62; Top Assembly "C2" at 3462.4,3903.89 h62
U$2: Top Assembly "Released under the Creative Commons Attribution Share-Alike 3.0 License" at 900,1200 h108.5; Top Assembly "http://creativecommons.org/licenses/by-sa/3.0" at 1700,1100 h108.5; Top Assembly "Designed by:" at 2150,1000 h108.5